# Altium PCB soldering_station_revB.PcbDoc
Units mil, origin at the board's own origin, x right, y up, seen from the top; angles counter-clockwise.
Board outline 3150 x 3390 mil, 2 copper layers (Top Layer, Bottom Layer); 96 components, 51 nets, 269 pads, 76 vias.
Unrouted connection lines stored in the file: 92.
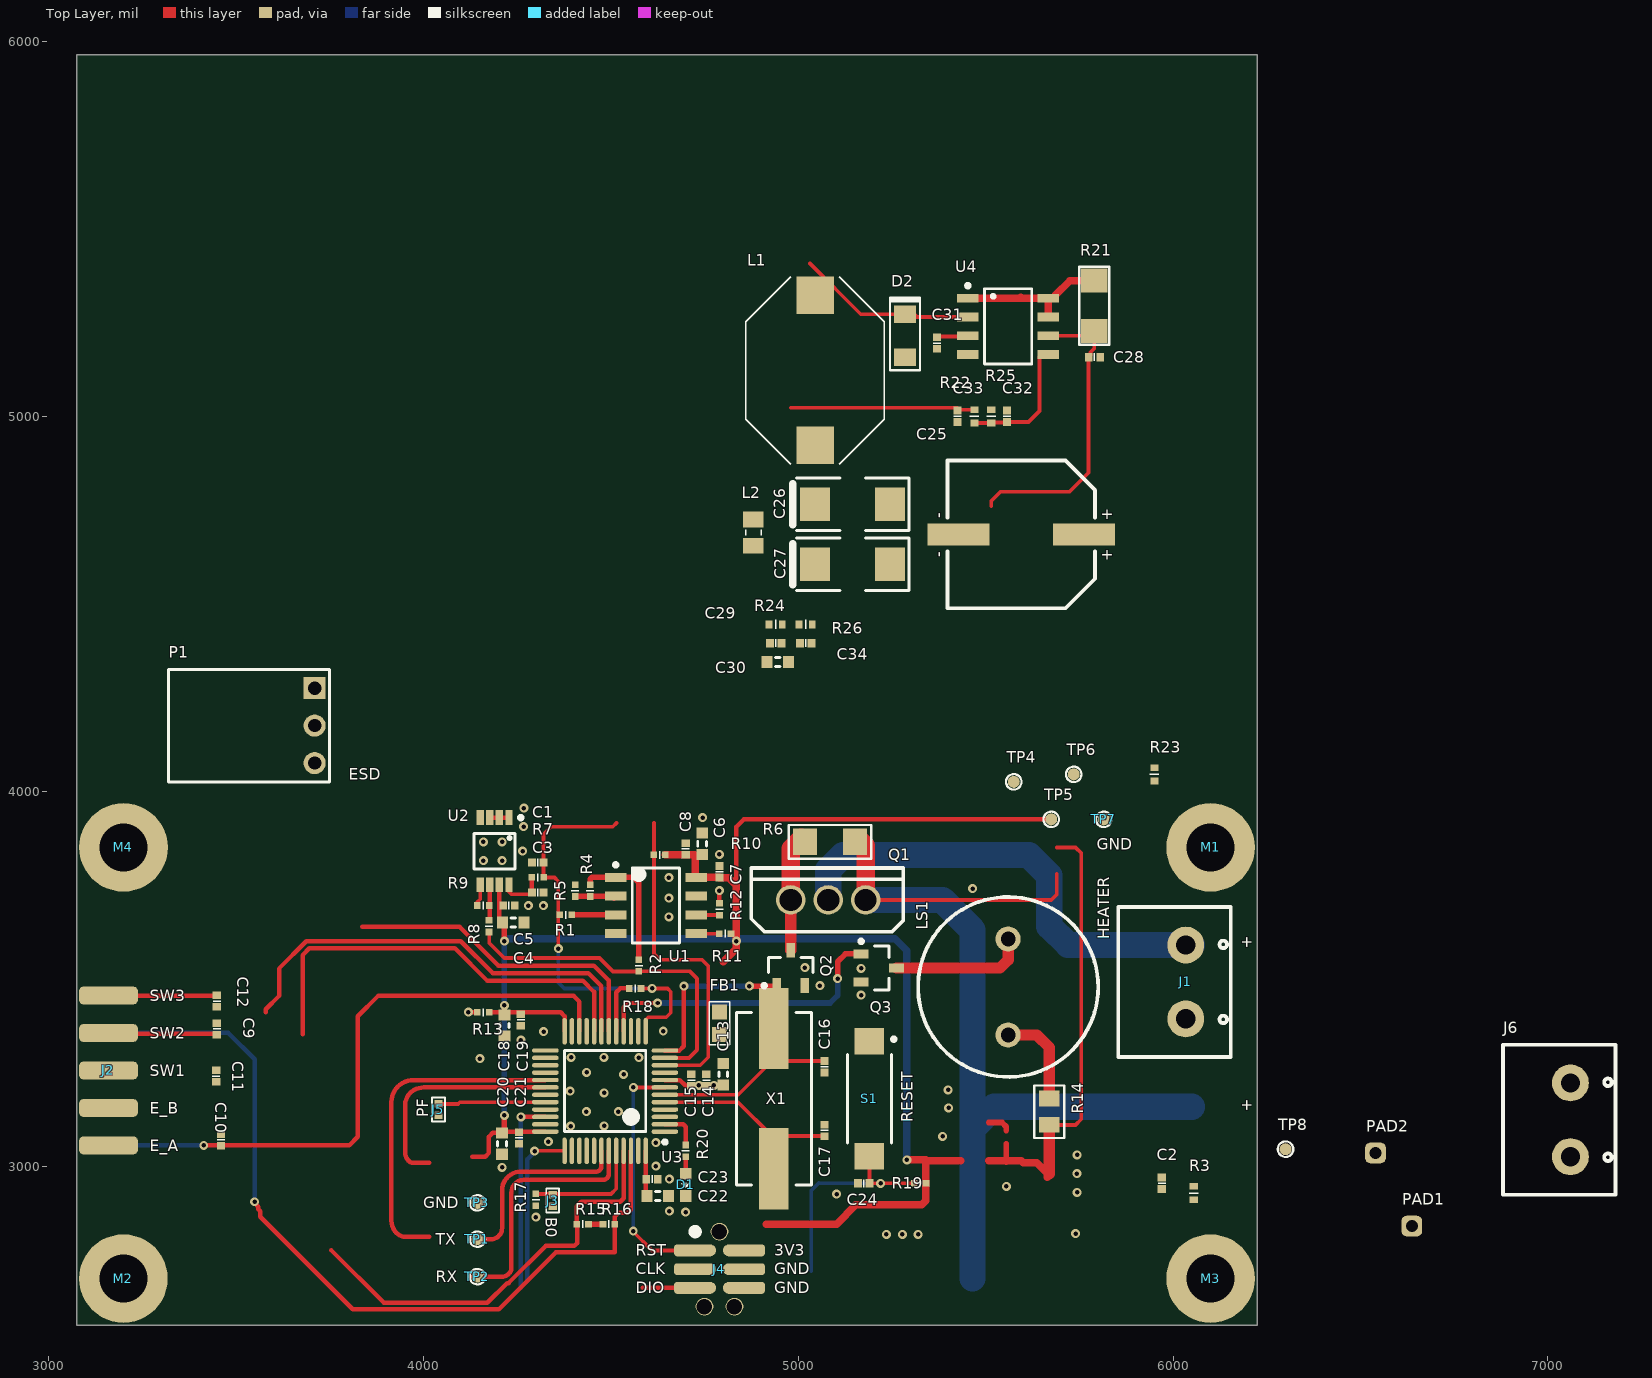
[diagram p0: Top Layer view]
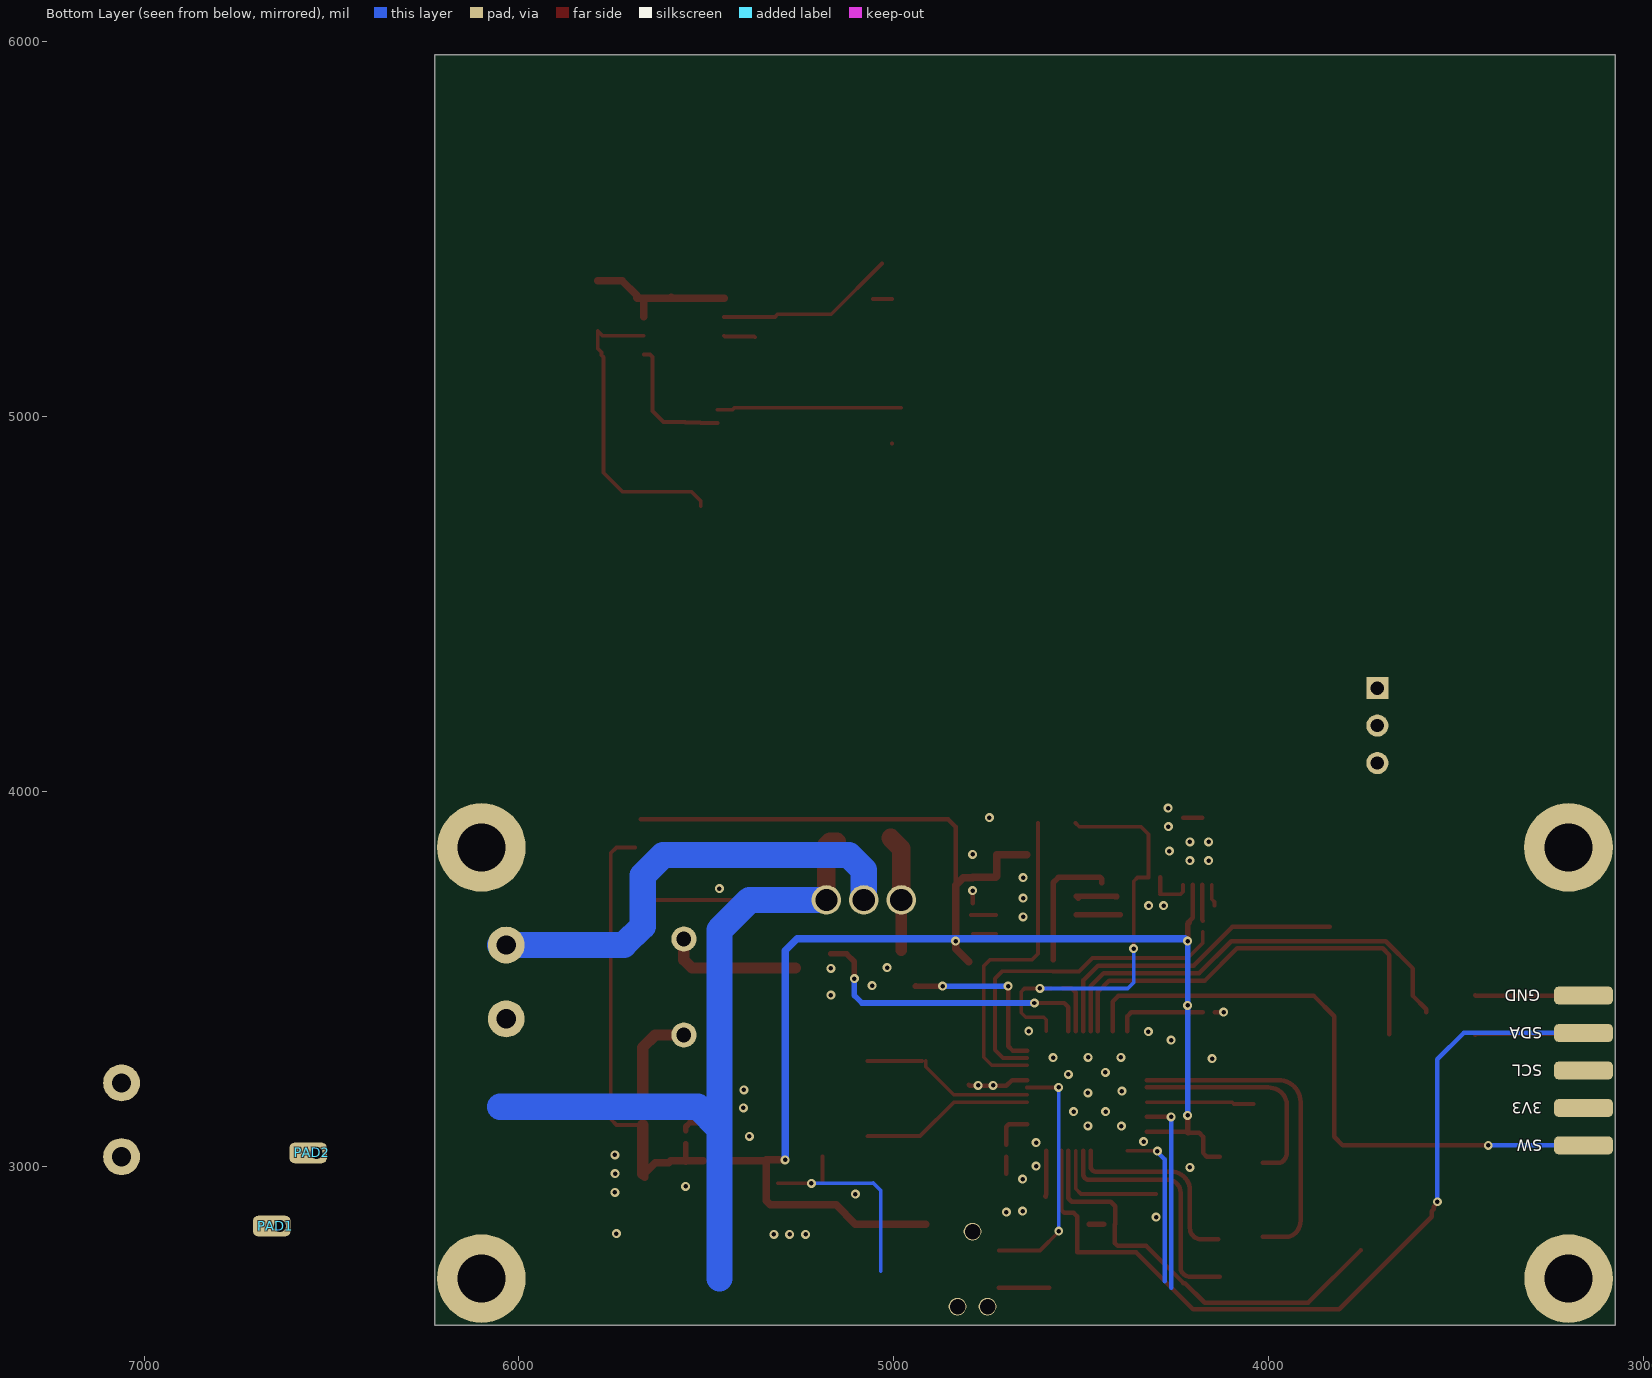
[diagram p1: Bottom Layer view, seen from below]
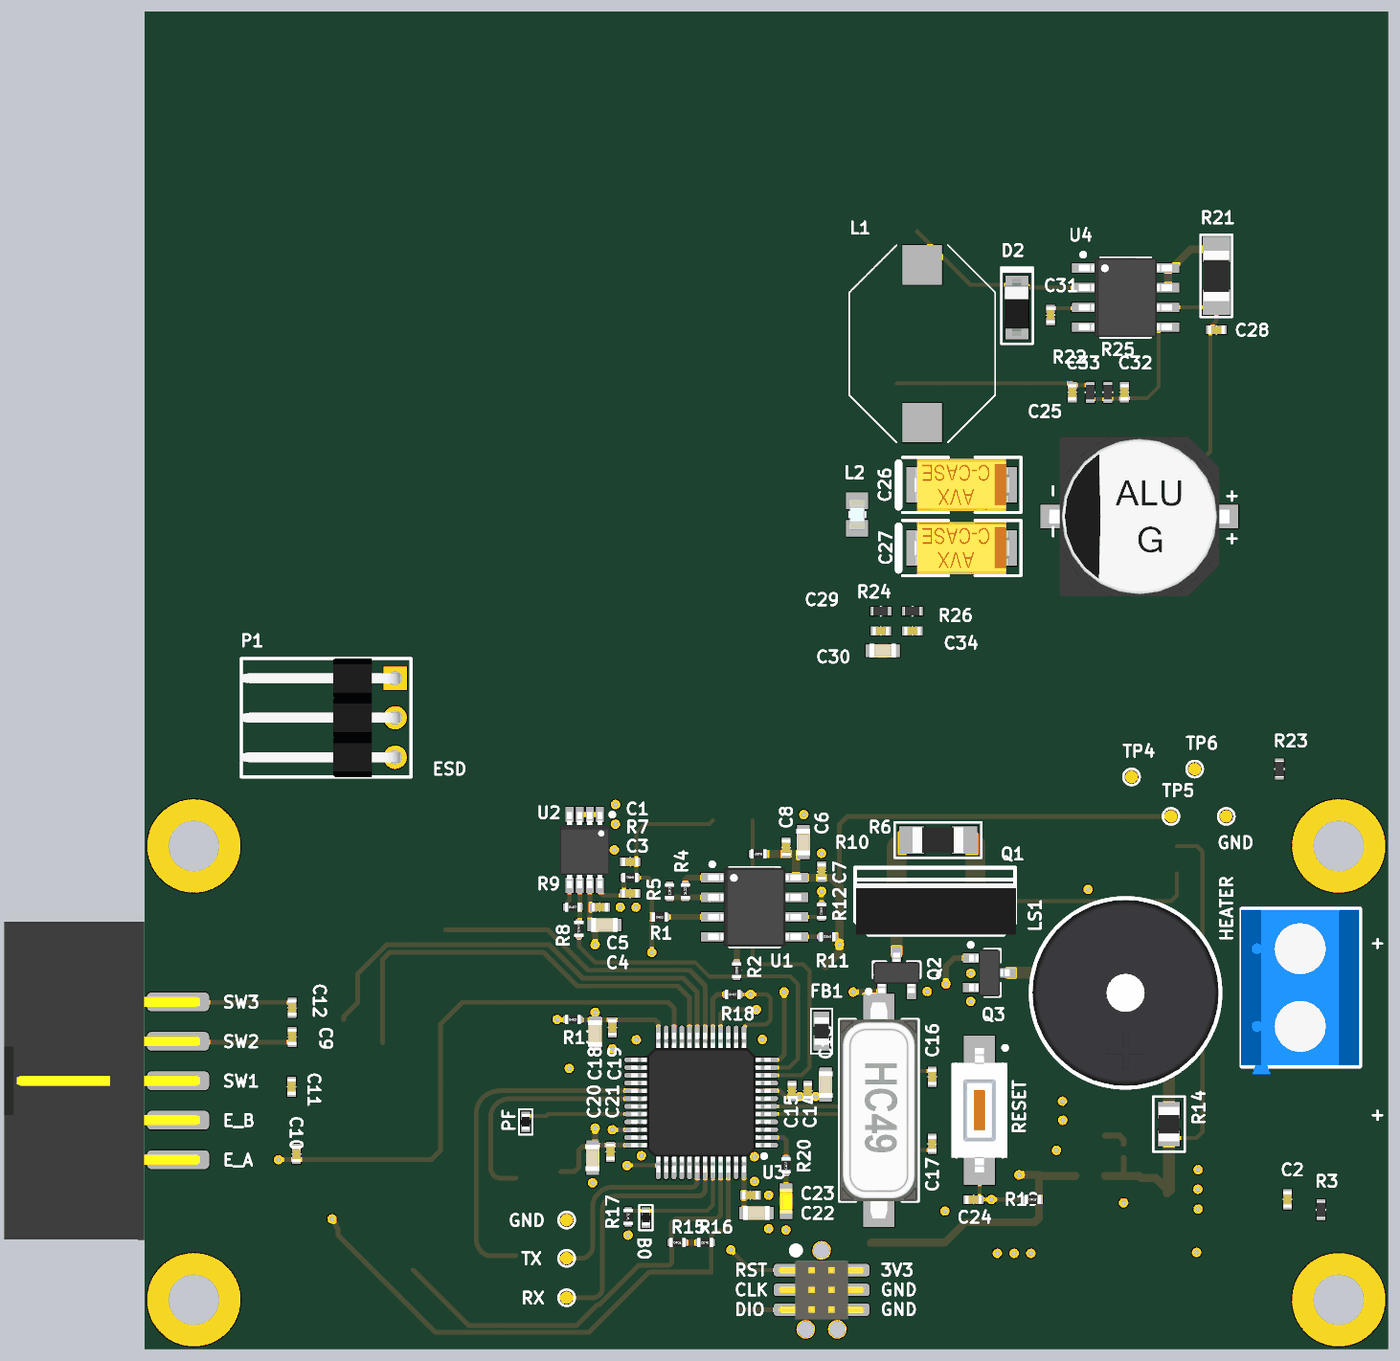
[diagram p2: 3D render of the assembled board from above, using the file's embedded part models]

## Layer stack, top to bottom
Top Solder: solder mask 0.4, Solder Resist, Dk 3.5
Top Layer: signal copper 1.4
Dielectric 1: dielectric 12.6, FR-4, Dk 4.8
Bottom Layer: signal copper 1.4
Bottom Solder: solder mask 0.4, Solder Resist, Dk 3.5

## Board outline
3075,2575 6225,2575 6225,5965 3075,5965

## Design rules (kind name [scope] priority, off if disabled: settings)
BoardOutlineClearance [All] p1: gap=7.87 ignorepadtopadclearanceinfootprint=FALSE
Clearance [All] p1: gap=5 ignorepadtopadclearanceinfootprint=FALSE except(9.84: Arc-Hole Track-Hole SMDPad-Hole THPad-Hole Via-Hole Fill-Hole Poly-Hole Region-Hole Text-Hole)
ComponentClearance [All] p1: gap=5 collisioncheckmode=3 verticalgap=5 showdistances=TRUE
DiffPairsRouting [All] p1: maxlimit=10 minlimit=5 mostfreqgap=5 toplayer_minwidth=5 toplayer_maxwidth=1000 toplayer_prefwidth=5 bottomlayer_minwidth=5 bottomlayer_maxwidth=1000 bottomlayer_prefwidth=5 maxuncoupledlength=500
Height [All] p1: minheight=0 maxheight=71497.94 prefheight=500
HoleSize [All] p1: absolutevalues=TRUE maxlimit=248.03 minlimit=11.81 maxpercent=80.000 minpercent=20.000
HoleToHoleClearance [All] p1: gap=9.84 allowstackedmicrovias=FALSE
MinimumAnnularRing [All] p1: minimumring=3
MinimumSolderMaskSliver [All] p1: minsoldermaskwidth=0
PlaneClearance [All] p1: clearance=5
PlaneConnect PlaneConnectPowerPads [InPadClass('PowerPads')] p1: planeconnectstyle=Direct reliefexpansion=20 reliefentries=4 reliefconductorwidth=10 reliefairgap=10
PlaneConnect [All] p2: pad.planeconnectstyle=Relief pad.reliefexpansion=11.81 pad.reliefentries=4 pad.reliefconductorwidth=5 pad.reliefairgap=5 via.planeconnectstyle=Direct via.reliefexpansion=11.81 via.reliefentries=4 via.reliefconductorwidth=5 via.reliefairgap=5
PolygonConnect PolygonConnectPowerPads [All vs (InPadClass('PowerPads'))] p1: connectstyle=Direct reliefconductorwidth=10 reliefentries=4 polygonreliefangle="90 Angle" airgapwidth=10
PolygonConnect [All] p2: thpad.connectstyle=Relief thpad.reliefconductorwidth=20 thpad.reliefentries=4 thpad.polygonreliefangle="90 Angle" thpad.airgapwidth=5 smdpad.connectstyle=Relief smdpad.reliefconductorwidth=10 smdpad.reliefentries=4 smdpad.polygonreliefangle="90 Angle" smdpad.airgapwidth=5 via.connectstyle=Direct via.reliefconductorwidth=5 via.reliefentries=4 via.polygonreliefangle="90 Angle" via.airgapwidth=5
RoutingVias [All] p1: holewidth=11.81 width=23.62 viastyle="Through Hole" minholewidth=11.81 minwidth=23.62 maxholewidth=23.62 maxwidth=259.84
SilkToSilkClearance [All] p1: silktosilkclearance=0
SilkToSolderMaskClearance SilkToSolderMaskClearance_C0805 [HasFootprint('C_0805_2012')] p1: minsilkscreentomaskgap=3 clearancetoexposedcopper=TRUE
SilkToSolderMaskClearance SilkToSolderMaskClearance_C0603 [HasFootprint('C_0603_1608')] p2: minsilkscreentomaskgap=3 clearancetoexposedcopper=TRUE
SilkToSolderMaskClearance SilkToSolderMaskClearance_R0402 [HasFootprint('R_0402_1005')] p3: minsilkscreentomaskgap=3 clearancetoexposedcopper=TRUE
SilkToSolderMaskClearance SilkToSolderMaskClearance_C0402 [HasFootprint('C_0402_1005')] p4: minsilkscreentomaskgap=3 clearancetoexposedcopper=TRUE
SilkToSolderMaskClearance [IsPad] p5: minsilkscreentomaskgap=5 clearancetoexposedcopper=TRUE
SolderMaskExpansion SolderMaskExpansion_Via [IsVia] p1: expansion=0 istentingtop=FALSE soldermaskfromhole=TRUE
SolderMaskExpansion [All] p2: expansion=2.95 istentingtop=FALSE
Width [All] p1: maxlimit=1000 minlimit=3 preferedwidth=5 minimp=50.000000 maximp=50.000000 favimp=50.000000
20 further rules are at their usual default settings.

## Classes and differential pairs
component class top: J6 M1 M2 M3 M4 PAD1 PAD2 TP7 TP8
component class U_heater: C1 C2 C3 C4 C5 C6 C7 C8 J1 P1 Q1 Q2 R1 R2 R3 R4 R5 R6 R7 R8 R9 R10 R11 R12 U1 U2
component class U_PSU: C25 C26 C27 C28 C29 C30 C31 C32 C33 C34 D2 L1 L2 R21 R22 R23 R24 R25 R26 TP4 TP5 TP6 U4
component class U_MCU: C9 C10 C11 C12 C13 C14 C15 C16 C17 C18 C19 C20 C21 C22 C23 C24 D1 FB1 J2 J3 J4 J5 LS1 Q3 R13 R14 R15 R16 R17 R18 R19 R20 S1 TP1 TP2 TP3 U3 X1

## Components (designator, comment, footprint, x,y, rotation, side; value= is the part's Value field where it differs from the comment)
C1 "Ceramic X7R" C_0402_1005 4305.35,3810 r180 top value=100nF
C2 "Ceramic X7R" C_0402_1005 5970,2954.35 r90 top value=100nF
C3 "Ceramic X7R" C_0402_1005 4305,3730 r0 top value=100nF
C4 "Ceramic X5R" C_0603_1608 4240,3650 r0 top value=10uF
C5 "Ceramic X7R" C_0402_1005 4228.39,3695 r0 top value=100nF
C6 "Ceramic X7R" C_0603_1608 4743.86,3860 r90 top value=1uF
C7 "Ceramic X7R" C_0402_1005 4790,3785 r90 top value=100nF
C8 "Ceramic X7R" C_0402_1005 4700,3845.91 r90 top value=100nF
C9 "Ceramic X7R" C_0402_1005 3449.14,3365.99 r90 top value=100nF
C10 "Ceramic X7R" C_0402_1005 3460,3069.65 r90 top value=100nF
C11 "Ceramic X7R" C_0402_1005 3447.53,3240 r270 top value=100nF
C12 "Ceramic X7R" C_0402_1005 3449.14,3440 r270 top value=100nF
C13 "Ceramic X7R" C_0603_1608 4800,3245.35 r270 top value=1uF
C14 "Ceramic X7R" C_0402_1005 4755,3229.53 r270 top value=100nF
C15 "Ceramic X7R" C_0402_1005 4715,3229.53 r270 top value=10nF
C16 "Ceramic C0G" C_0402_1005 5070,3265 r270 top value=22pF
C17 "Ceramic C0G" C_0402_1005 5070,3095 r90 top value=22pF
C18 "Ceramic X7R" C_0603_1608 4216.26,3375 r270 top value=1uF
C19 "Ceramic X7R" C_0402_1005 4260,3390 r270 top value=100nF
C20 "Ceramic X7R" C_0603_1608 4210,3060 r270 top value=1uF
C21 "Ceramic X7R" C_0402_1005 4255,3075 r270 top value=100nF
C22 "Ceramic X7R" C_0603_1608 4625,2920 r0 top value=1uF
C23 "Ceramic X7R" C_0402_1005 4610,2965 r0 top value=100nF
C24 "Ceramic X7R" C_0402_1005 5175,2954 r180 top value=100nF
C25 "Electrolytic Capacitor" CE_D_10x10MM 5595,4685 r180 top value=100uF
C26 "Tantalum Capacitor" CT_2312_6032 5145,4765.01 r180 top value=470uF
C27 "Tantalum Capacitor" CT_2312_6032 5145,4605 r180 top value=100uF
C28 "Ceramic X7R" C_0402_1005 5790,5157.91 r0 top value=100nF
C29 "Ceramic X7R" C_0402_1005 4940,4395 r0 top value=100nF
C30 "Ceramic X7R" C_0603_1608 4945,4345 r0 top value=1uF
C31 "Ceramic C0G" C_0402_1005 5370,5195.35 r270 top value=470pF
C32 "Ceramic X7R" C_0402_1005 5557.23,5000 r90 top value=100nF
C33 "Ceramic X7R" C_0402_1005 5425,5000 r270 top value=100nF
C34 "Ceramic X7R" C_0402_1005 5020,4395 r0 top value=100nF
D1 "USER" OL_0603_1608 4700,2950 r90 top value=LTST-C190KRKT
D2 "1N5819HW" SOD123 5285,5215 r270 top value=1N5819HW-7-F
FB1 "Ferrite bead" FB_0603_1608 4790,3380.91 r270 top value=BLM18EG221TN1D
J1 "HEATER" J_ARK2 6033.94,3491.18 r270 top value=DG301-5.0-02P-12-18A(H)
J2 "2x5 IDC" "IDC 2x5 EDGE" 3160,3255 r90 top
J3 "B0" "SOLDER BRIDGE 0402" 4345,2908.05 r90 top
J4 "SWD" TagConnectSWD 4765,2775 r270 top
J5 "PF" "SOLDER BRIDGE 0402" 4040.35,3150.79 r90 top
J6 "PSU" J_ARK2 7060,3123.43 r270 top value=DG301-5.0-02P-12-18A(H)
L1 "DL22" DL22 5045,4922.83 r90 top value=220uH
L2 "Inductor" L_0805_2012 4880,4690 r270 top value=1uH
LS1 "LD-BZEN-1205" LD-BZEN-1205 5560,3477.76 r180 top
M1 "M3 Hole" "M3 Hole" 6115,3850 r0 top
M2 "M3 Hole" "M3 Hole" 3215,2700 r0 top
M3 "M3 Hole" "M3 Hole" 6115,2700 r0 top
M4 "M3 Hole" "M3 Hole" 3215.12,3850 r0 top
P1 "MEASURE" P_HEADER_1x3_2.54_ANGLE 3710,4175 r270 top value=22-28-8032
PAD1 "PAD" PAD_08mm 6637,2840 r90 top
PAD2 "PAD" PAD_08mm 6540,3035 r90 top
Q1 "IRF4905" IRF4905 5080,3710 r90 top
Q2 "NX7002AK" NX7002AK.215 4980,3528.58 r90 top
Q3 "NX7002AK" NX7002AK.215 5215,3528.58 r0 top
R1 "Resistor" R_0402_1005#1 4380,3670 r0 top value=1k
R2 "Resistor" R_0402_1005#1 4575.08,3535 r270 top value=0R
R3 "Resistor" R_0402_1005#2 6055,2928.03 r90 top value=1k
R4 "Resistor" R_0402_1005#1 4445,3735 r90 top value=10k
R5 "Resistor" R_0402_1005#1 4405,3735 r270 top value=1k
R6 "Resistor" R_1206_3216 5085,3865 r0 top value=1k
R7 "Resistor" R_0402_1005#1 4305,3770 r180 top value=0R
R8 "Resistor" R_0402_1005#1 4175,3640 r270 top value=0R
R9 "Resistor" R_0402_1005#1 4160,3695 r0 top value=0R
R10 "Resistor" R_0402_1005#1 4630,3830 r180 top value=470R
R11 "Resistor" R_0402_1005#1 4805,3620 r180 top value=1k
R12 "Resistor" R_0402_1005#1 4790,3685 r270 top value=1k
R13 "Resistor" R_0402_1005#1 4160,3410 r0 top value=22k
R14 "Resistor" R_0805_2012 5670,3145 r270 top value=100R
R15 "Resistor" R_0402_1005#1 4425,2845 r0 top value=4.7k
R16 "Resistor" R_0402_1005#1 4494.84,2845 r180 top value=4.7k
R17 "Resistor" R_0402_1005#1 4300,2910 r90 top value=100k
R18 "Resistor" R_0402_1005#1 4565,3473.76 r0 top value=1k
R19 "Resistor" R_0402_1005#1 5325,2954 r0 top value=100k
R20 "Resistor" R_0402_1005#1 4700,3040.55 r90 top value=470R
R21 "Resistor" R_1206_3216 5790,5295 r90 top value=330k
R22 "Resistor" R_0402_1005#2 5470,5000 r90 top value=360k
R23 "Resistor" R_0402_1005#2 5950,4045 r90 top value=470R
R24 "Resistor" R_0402_1005#2 4940,4445 r180 top value=10k
R25 "Resistor" R_0402_1005#2 5515,5000 r270 top value=220k
R26 "Resistor" R_0402_1005#2 5020,4445 r180 top value=10k
S1 "RESET" S_TACTSWITCH3x6 5190,3180 r270 top
TP1 "TX" TP_PAD 4144.25,2805 r90 top
TP2 "RX" TP_PAD 4144.25,2705 r90 top
TP3 "GND" TP_PAD 4144.25,2901.86 r90 top
TP4 "VIN" TP_PAD 5575,4025 r90 top
TP5 "3V3" TP_PAD 5675,3925 r90 top
TP6 "GND" TP_PAD 5735,4045 r90 top
TP7 "GND" TP_PAD 5815,3925 r90 top
TP8 "GND" TP_PAD 6300,3045 r90 top
U1 "OPA2342" OPA2342 4620.35,3695 r0 top
U2 "AD8495" AD8494 4190,3840 r270 top
U3 "STM32F103C8T6" LQFP48_7x7 4485,3200 r180 top
U4 "AZ34063U" AZ34063UMTR-G1 5560,5240 r0 top
X1 "6MHz Crystal" X_HC49_SMD 4935,3180 r270 top value=8MHz

## Footprints (in the part's own frame and the unit in brackets; to place one, negate y for a bottom-side part, rotate by r counter-clockwise, add the part's x,y. Pads: shape width x height; smd on the part's side, far side on the other; paste and mask are expansions set on the pad)
AD8494 [mm] "Precision Thermocouple Amplifiers  with Cold Junction Compensation"
  rect 1x0.5 smd: 1(-2.275,0.975) 2(-2.275,0.325) 3(-2.275,-0.325) 4(-2.275,-0.975) 5(2.275,-0.975) 6(2.275,-0.325) 7(2.275,0.325) 8(2.275,0.975)
  silkscreen extent -2.4,-1.4 1.2,1.9, body extent -2.45,-1.6 2.45,1.6, height 1.1
AZ34063UMTR-G1 [mm] "SOIC-8, IC: PMIC; przetwornica DC/DC; Uwej: 3÷36VDC; Uwyj: 1,25÷36VDC; 1,5A"
  rect 1.45x0.6 smd: 1(-2.725,1.905) 2(-2.725,0.635) 3(-2.725,-0.635) 4(-2.725,-1.905) 5(2.725,-1.905) 6(2.725,-0.635) 7(2.725,0.635) 8(2.725,1.905)
  silkscreen extent -2.85,-2.55 1.6,2.88, body extent -3,-2.55 3,2.55, height 1.35
C_0402_1005 [mm]
  rect 0.52x0.56 smd: 1(-0.39,0) 2(0.39,0)
  silkscreen extent 0,-0.25 0,0.25, body extent -0.52,-0.27 0.53,0.28, height 0.55
C_0603_1608 [mm]
  rect 0.75x0.8 smd: 1(-0.725,0) 2(0.725,0)
  silkscreen extent -0.15,-0.3 0.15,0.3, body extent -0.85,-0.45 0.85,0.45, height 0.89
CE_D_10x10MM [mm]
  rect 4.2x1.5 smd: 1(-4.262,0) 2(4.262,0)
  silkscreen extent -5,-5 5,5, body extent -5.8,-5.15 5.8,5.15, height 10.2
CT_2312_6032 [mm]
  rect 2.03x2.28 smd: 1(2.54,0) 2(-2.54,0)
  silkscreen extent -3.81,-1.78 4.06,1.78, body extent -3.05,-1.67 3.05,1.68, height 2.7
DL22 [mil] "DL22 9.4mm Wire Coil"
  rect 100x100 smd: 1(0,0) 2(400,0)
  silkscreen extent -50,-185 450,185
FB_0603_1608 [mil]
  rect 39x40 smd: 1(-30,0) 2(30,0)
  silkscreen extent -57,-27 57,27, body extent -34,-19 34,19, height 21
"IDC 2x5 EDGE" [mm] "10 pin 2x5 IDC 2.54mm Edge mounted"
  rrect50% 1.2x4 smd: 1(-5.08,0) 2(-2.54,0) 3(0,0) 4(2.54,0) 5(5.08,0)
  rrect50% 1.2x4 smd far side: 6(-5.08,0) 7(-2.54,0) 8(0,0) 9(2.54,0) 10(5.08,0)
  body extent -10.25,-1.42 10.25,11.18, height 3.58
IRF4905 [mm] "PMOS TO220"
  round 2 hole 1.5: 1(0,2.54) 2(0,0) 3(0,-2.54)
  silkscreen extent -2.16,-5.08 2.16,5.21, body extent -2.16,-5.15 1.14,5.15, height 19.6
J_ARK2 [mm]
  round 2.5 hole 1.3: 1(-2.5,0) 2(2.5,0)
  silkscreen extent -5.08,-4.57 5.08,3.05, body extent -5,-4.6 5.6,3, height 10.05
L_0805_2012 [mil]
  rect 42x55 smd: 1(-35,0) 2(35,0)
  silkscreen extent -7,-20 7,21, body extent -39,-21 39,21, height 50
LD-BZEN-1205 [mm] "Przetwornik dźwięku: elektromagnetyczny; THT; 2,4kHz; 40mA; H: 9mm"
  round 1.7 hole 1: 1(0,3.25) 2(0,-3.25)
  silkscreen extent -6.1,-6.1 6.1,6.1, body extent -5.99,-6 5.99,6, height 7.6
LQFP48_7x7 [mm] "LQFP, 48-Leads, Body 7x7mm, Pitch 0.5mm, IPC Medium Density"
  oval 1.8x0.3 smd: 1(-4.05,2.75) 2(-4.05,2.25) 3(-4.05,1.75) 4(-4.05,1.25) 5(-4.05,0.75) 6(-4.05,0.25) 7(-4.05,-0.25) 8(-4.05,-0.75) 9(-4.05,-1.25) 10(-4.05,-1.75) 11(-4.05,-2.25) 12(-4.05,-2.75) 25(4.05,-2.75) 26(4.05,-2.25) 27(4.05,-1.75) 28(4.05,-1.25) 29(4.05,-0.75) 30(4.05,-0.25) 31(4.05,0.25) 32(4.05,0.75) 33(4.05,1.25) 34(4.05,1.75) 35(4.05,2.25) 36(4.05,2.75)
  oval 0.3x1.8 smd: 13(-2.75,-4.05) 14(-2.25,-4.05) 15(-1.75,-4.05) 16(-1.25,-4.05) 17(-0.75,-4.05) 18(-0.25,-4.05) 19(0.25,-4.05) 20(0.75,-4.05) 21(1.25,-4.05) 22(1.75,-4.05) 23(2.25,-4.05) 24(2.75,-4.05) 37(2.75,4.05) 38(2.25,4.05) 39(1.75,4.05) 40(1.25,4.05) 41(0.75,4.05) 42(0.25,4.05) 43(-0.25,4.05) 44(-0.75,4.05) 45(-1.25,4.05) 46(-1.75,4.05) 47(-2.25,4.05) 48(-2.75,4.05)
  silkscreen extent -4.18,-2.75 2.75,3.57, body extent -4.5,-4.5 4.5,4.5, height 1.6
"M3 Hole" [mm] "M3 Bolt Hole; 3.25 mm / 6 mm"
  round 6 hole 3.25: 1(-0.381,0)
NX7002AK.215 [mm] "Tranzystor: N-MOSFET; unipolarny; 60V; 0,12A; 325mW; SOT23"
  rect 1x0.6 smd: 1(-1.2,0.95) 2(-1.2,-0.95) 3(1.2,0)
  silkscreen extent -1.32,-1.5 0.7,1.92, body extent -1.3,-1.5 1.3,1.5, height 1.2
OL_0603_1608 [mm]
  rect 0.8x0.8 smd: 1(-0.75,0) 2(0.75,0)
  silkscreen extent -0.15,-0.25 0.15,0.25, body extent -0.8,-0.4 0.8,0.4, height 0.75
OPA2342 [mm] "Wzmacniacz operacyjny; 1MHz; 2,7E,5V; Kanały: 2; SO8"
  rect 1.45x0.6 smd: 1(-2.725,1.905) 2(-2.725,0.635) 3(-2.725,-0.635) 4(-2.725,-1.905) 5(2.725,-1.905) 6(2.725,-0.635) 7(2.725,0.635) 8(2.725,1.905)
  silkscreen extent -2.85,-2.55 1.6,2.88, body extent -3,-2.55 3,2.55, height 2.5
P_HEADER_1x3_2.54_ANGLE [mm] "Connector; Header; 3 Position, Male"
  rect 1.5x1.5 hole 0.9: 1(-2.54,0)
  round 1.5 hole 0.9: 2(0,0) 3(2.54,0)
  silkscreen extent -3.81,-9.91 3.81,1.02, body extent -3.81,-10 3.81,0.32, height 2.65
PAD_08mm [mm]
  rrect50% 1.4x1.4 hole 0.8: 1(0,0)
  rrect50% 1.4x2.5 smd far side: 1(0,-0.584)
R_0402_1005#1 [mm]
  rect 0.45x0.45 smd: 1(-0.4,0) 2(0.4,0)
  silkscreen extent 0,-0.25 0,0.25, body extent -0.52,-0.3 0.52,0.3, height 0.34
R_0402_1005#2 [mm] "Chip Resistor, 2-Leads, Body 1.00x0.50mm, IPC High Density"
  rect 0.45x0.55 smd: 1(-0.45,0) 2(0.45,0)
  silkscreen extent 0,-0.3 0,0.3, body extent -0.53,-0.28 0.53,0.28, height 0.37
R_0805_2012 [mil]
  rect 42x55 smd: 1(-35,0) 2(35,0)
  silkscreen extent -70,-40 70,40, body extent -43,-27 43,27, height 27
R_1206_3216 [mil]
  rect 64x70 smd: 1(-67,0) 2(67,0)
  silkscreen extent -110,-45 110,45, body extent -64,-32 64,32, height 27
S_TACTSWITCH3x6 [mm] "SODFL, 2-Leads, Body 3,00x8,00mm, IPC Medium Density"
  rect 1.8x2 smd: 1(-3.9,0) 2(3.9,0)
  silkscreen extent -4.15,-1.5 3,1.78, body extent -4,-1.8 4,1.8, height 2.6
SOD123 [mm]
  rect 1.2x1.5 smd: 1(-1.45,0) 2(1.45,0)
  silkscreen extent -2.57,-1.02 2.34,1.02, body extent -1.86,-0.81 1.84,0.79, height 1.27
"SOLDER BRIDGE 0402" [mm] "Solder Bridge 0402 Footprint"
  rect 0.52x0.56 smd: 1(-0.39,0) 2(0.39,0)
  silkscreen extent -0.81,-0.43 0.81,0.43, body extent -0.51,-0.25 0.51,0.25, height 0.36
TagConnectSWD [mm] "6-pin TagConnect and 1.27mm IDC SWD Header"
  round 0.8 smd: 1(0,0) 2(0,1.27) 3(1.27,0) 4(1.27,1.27) 5(2.54,0) 6(2.54,1.27)
  rrect50% 0.8x2.6 smd: 1(0,-1.143) 2(0,2.413) 3(1.27,-1.143) 4(1.27,2.413) 5(2.54,-1.143) 6(2.54,2.413)
  round 1.2 hole 1.05: 7(-1.27,0.635) 7(3.81,-0.381) 7(3.81,1.651)
  silkscreen extent -1.47,-1.22 -1.07,-0.82, body extent -0.64,-2.11 3.18,3.39, height 4.5
TP_PAD [mil] "Small SMD testpoint"
  round 32 smd paste-16: 1(0,0)
  silkscreen extent -21,-21 21,21
X_HC49_SMD [mm] "HC49, 2-Leads"
  rect 5.5x2 smd: 1(-4.75,0) 2(4.75,0)
  silkscreen extent -5.84,-2.54 5.84,2.54, body extent -6.95,-2.5 6.95,2.5, height 4.5

## Part data
C1 C2 C3 C5 C9 C10 C11 C12 C14 C19 C21 C23 C24 C29 C32 C33 C34: library part C_100nF_16V_X7R_0402_10, "Capacitor", Dielectric=X7R, Manufacturer=Murata, Manufacturer Part Number=GRM155R71C104KA88D, Tolerance (%)=10, Voltage=16V, HelpURL=https://www.mouser.com/ds/2/281/c02e-2905.pdf, Part Number=C_100nF_16V_X7R_0402_10, SCH_Footprint=0402, Supplier 1=TME, Supplier 2="RS Components", Supplier 3=Farnell, Supplier 4=Mouser, Supplier 5=Digi-Key, Supplier Part Number 4=81-GRM155R71C104KA88
  C2 C32 C33 C34: Supplier 6=LCSC
C4: library part C_10uF_16V_X5R_0603_20, "Capacitor", Dielectric=X5R, Manufacturer="Samsung Electro-Mechanics", Manufacturer Part Number=CL10A106MO8NQNC, Tolerance (%)=20, Voltage=16V, HelpURL=http://www.tme.eu/pl/Document/4a42202b32dab16128fe107dd69598cc/samsung-chip-cap.pdf, Part Number=C_10uF_16V_X5R_0603_20, SCH_Footprint=0603, Supplier 1=TME, Supplier 2="RS Components", Supplier 3=Farnell, Supplier 4=Mouser, Supplier 5=Digi-Key, Supplier Part Number 1=CL10A106MO8NQNC
C6 C13 C18 C20 C22 C30: library part C_1uF_25V_X7R_0603_10, "Capacitor", Dielectric=X7R, Manufacturer=Samsung, Manufacturer Part Number=CL10B105KA8NNNC, Tolerance (%)=10, Voltage=25V, HelpURL=http://www.tme.eu/pl/Document/4a42202b32dab16128fe107dd69598cc/samsung-chip-cap.pdf, Part Number=C_1uF_25V_X7R_0603_10, SCH_Footprint=0603, Supplier 1=TME, Supplier 2="RS Components", Supplier 3=Farnell, Supplier 4=Mouser, Supplier 5=Digi-Key, Supplier Part Number 1=CL10B105KA8NNNC
C7 C8 C28: library part C_100nF_50V_X7R_0402_10, "Capacitor", Dielectric=X7R, Manufacturer=Murata, Manufacturer Part Number=GRM155R71H104KE14D, Tolerance (%)=10, Voltage=50V, HelpURL=http://docs-europe.electrocomponents.com/webdocs/145f/0900766b8145f9d2.pdf, Part Number=C_100nF_50V_X7R_0402_10, SCH_Footprint=0402, Supplier 1=TME, Supplier 2="RS Components", Supplier 3=Farnell, Supplier 4=Mouser, Supplier 5=Digi-Key, Supplier Part Number 1=GRM155R71H104KE14D, Supplier Part Number 2=8847087, Supplier Part Number 3=2611912, Supplier Part Number 4=81-GRM155R71H104KE4D, Supplier Part Number 5=490-10700-1-ND
  C28: Supplier 6=LCSC
C15: library part C_10nF_25V_X7R_0402_10, "Capacitor", Dielectric=X7R, Manufacturer=Murata, Manufacturer Part Number=GRM155R71E103KA01D, Tolerance (%)=10, Voltage=25V, HelpURL=http://www.tme.eu/en/Document/e3e731e59cc68b1ab6d46b158bb05733/MURATA_GRM.pdf, Part Number=C_10nF_25V_X7R_0402_10, SCH_Footprint=0402, Supplier 1=TME, Supplier 2="RS Components", Supplier 3=Farnell, Supplier 4=Mouser, Supplier 5=Digi-Key, Supplier Part Number 1=GRM155R71E103KA01D, Supplier Part Number 2=6242301, Supplier Part Number 3=8819734, Supplier Part Number 4=81-GRM36X103K25, Supplier Part Number 5=490-1312-1-ND
C16 C17: library part C_22pF_50V_C0G_0402_5, "Capacitor", Dielectric=C0G, Manufacturer=AVX, Manufacturer Part Number=04025A220JAT2A, Tolerance (%)=5, Voltage=50V, HelpURL=http://datasheet.octopart.com/04025A220JAT2A-AVX-datasheet-9883399.pdf, Part Number=C_22pF_50V_C0G_0402_5, SCH_Footprint=0402, Supplier 1=TME, Supplier 2="RS Components", Supplier 3=Farnell, Supplier 4=Mouser, Supplier 5=Digi-Key, Supplier Part Number 1=04025A220JAT2A, Supplier Part Number 2=6983087, Supplier Part Number 3=2280776, Supplier Part Number 4=581-04025A220J, Supplier Part Number 5=478-1074-1-ND
C25: library part CE_100uF_50V_AL2O3_10x10_20, "Polarized Capacitor", Dielectric=AL2O3, Manufacturer=Nichicon, Manufacturer Part Number=UUX1H101MNL1GS, Tolerance (%)=20, Voltage=50V, HelpURL=https://datasheet.octopart.com/UUX1H101MNL1GS-Nichicon-datasheet-62047998.pdf, Part Number=CE_100uF_50V_AL2O3_10x10_20, SCH_Footprint=10x10, Supplier 1=TME, Supplier 2="RS Components", Supplier 3=Farnell, Supplier 4=Mouser, Supplier 5=Digi-Key, Supplier 6=LCSC, Supplier Part Number 1=UUX1H101MNL1GS, Supplier Part Number 2=739-3107, Supplier Part Number 3=2841943, Supplier Part Number 4=647-UUX1H101MNL1GS, Supplier Part Number 5=493-6269-1-ND
C26 C27: library part CT_22uF_16V_TA2O5_2312_10, "Capacitor", Dielectric=TA2O5, Manufacturer=Kemet, Manufacturer Part Number=T494C226K016AT, Tolerance (%)=10, Voltage=10V, HelpURL=https://content.kemet.com/datasheets/KEM_T2008_T494.pdf, Part Number=CT_22uF_16V_TA2O5_2312_10, SCH_Footprint=2312, Supplier 1=TME, Supplier 2="RS Components", Supplier 3=Farnell, Supplier 4=Mouser, Supplier 5=Digi-Key, Supplier 6=LCSC, Supplier Part Number 1=T494C226K016AT, Supplier Part Number 2=1726639, Supplier Part Number 3=2762195, Supplier Part Number 4=80-T494C226K016, Supplier Part Number 5=399-3845-1-ND
C31: library part C_470pF_50V_C0G_0402_5, "Capacitor", Dielectric=C0G, Manufacturer=AVX, Manufacturer Part Number=04025A471JAT2A, Tolerance (%)=5, Voltage=50V, HelpURL=http://datasheet.octopart.com/04025A471JAT2A-AVX-datasheet-9883399.pdf, Part Number=C_470pF_50V_C0G_0402_5, SCH_Footprint=0402, Supplier 1=TME, Supplier 2="RS Components", Supplier 3=Farnell, Supplier 4=Mouser, Supplier 5=Digi-Key, Supplier 6=LCSC, Supplier Part Number 2=6983119P, Supplier Part Number 3=2280781, Supplier Part Number 4=581-04025A471JAT2A, Supplier Part Number 5=478-7880-1-ND
D1: library part OL_R_0603, "LED_RED", Manufacturer=Lite-On, Manufacturer Part Number=LTST-C190KRKT, HelpURL=https://datasheet.octopart.com/LTST-C190KRKT-Lite-On-datasheet-158191.pdf, Part Number=OL_R_0603, SCH_Footprint=0603, Supplier 1=TME, Supplier 2="RS Components", Supplier 3=Farnell, Supplier 4=Mouser, Supplier 5=Digi-Key, Supplier Part Number 1=LTST-C190KRKT, Supplier Part Number 2=1769795, Supplier Part Number 4=859-LTST-C190KRKT, Supplier Part Number 5=160-1436-1-ND
D2: library part D_1N5819HW_1A_40V_SOD123, Current=1A, Manufacturer="Diodes Inc", Manufacturer Part Number=1N5819HW-7-F, Voltage=40V, HelpURL=https://datasheet.octopart.com/1N5819HW-7-F-Diodes-Inc.-datasheet-8332965.pdf, Part Number=D_1N5819HW_1A_40V_SOD123, SCH_Footprint=SOD123, Supplier 1=TME, Supplier 2="RS Components", Supplier 3=Farnell, Supplier 4=Mouser, Supplier 5=Digi-Key, Supplier 6=LCSC, Supplier Part Number 1=1N5819HW-7-F, Supplier Part Number 2=7082197, Supplier Part Number 3=1773475, Supplier Part Number 4=621-1N5819HW-F, Supplier Part Number 5=1N5819HW-FDICT-ND
FB1: library part FB_BLM18EG221TN1D, "Ferrite Bead", Current=1A, Manufacturer=Murata, Manufacturer Part Number=BLM18EG221TN1D, Resistance=150mR, HelpURL=http://datasheet.octopart.com/BLM18EG221TN1D-Murata-datasheet-66919.pdf, Part Number=FB_BLM18EG221TN1D, SCH_Footprint=0603, Supplier 1=TME, Supplier 2="RS Components", Supplier 3=Farnell, Supplier 4=Mouser, Supplier 5=Digi-Key, Supplier 6=LCSC, Supplier Part Number 2=7926243P, Supplier Part Number 3=1515717, Supplier Part Number 4=81-BLM18EG221TN1D, Supplier Part Number 5=490-5979-1-ND
J1 J6: library part J_TB-5.0-P-2P, "ARK Screw terminal, 2-Pin", Manufacturer="DEGSON ELECTRONICS", Manufacturer Part Number=DG301-5.0-02P-12-18A(H), Supplier Part Number 1=DG301-5.0-2/6B, Component Type=Standard, HelpURL=https://datasheet.octopart.com/DG301-5.0-03P-12-18A%28H%29-Degson-datasheet-17801202.pdf, Part Number=J_TB-5.0-P-2P, SCH_Footprint=ARK2, Supplier 1=TME, Supplier 2="RS Components", Supplier 3=Farnell, Supplier 4=Mouser, Supplier 5=Digi-Key
J2: library part IDC_2x5, "2x5 IDC Header"
J3 J5: library part "Solder Bridge", "Solder Bridge Jumper"
J4: library part TagConnectSWD, "TagConnect and 1.27mm IDC SWD Header"
L1: "Dławik: drutowy; SMD; 1uH; Ipracy: 7,1A; 8mΩ; Isat: 7,6A; B: 9,4mm"
L2: library part L_15uH_250mA_0805, "Induction", Current=1100mA, Manufacturer=VIKING, Manufacturer Part Number=NL05KTC1R0, Resistance=169mR, HelpURL=https://www.tme.eu/pl/details/nl05ktc1r0/dlawiki-smd-0805/viking/, Part Number=NL05KTC1R0, SCH_Footprint=0805, Supplier 1=TME, Supplier 2="RS Components", Supplier 3=Farnell, Supplier 4=Mouser, Supplier 5=Digi-Key, Supplier 6=LCSC, Supplier Part Number 3=2215651, Supplier Part Number 4=810-MLZ2012M150WT000, Supplier Part Number 5=445-6397-1-ND, Supplier Part Number 6=C383402
LS1: "Przetwornik dźwięku: elektromagnetyczny; THT; 2,4kHz; 40mA; H: 9mm"
M1 M2 M3 M4: "Inner diamater 3.25 mm Outer diamerer 6 mm"
P1: library part P_HEADER_1x3_2.54_ANGLE, "Pin Header", Manufacturer=Molex, Manufacturer Part Number=22-28-8032, HelpURL=https://datasheet.octopart.com/022288032-Molex-datasheet-8335722.pdf, Part Number=P_HEADER_1x3_2.54_ANGLE, SCH_Footprint="1x3 2.54mm", Supplier 1=TME, Supplier 2="RS Components", Supplier 3=Farnell, Supplier 4=Mouser, Supplier 5=Digi-Key, Supplier 6=LCSC, Supplier Part Number 4=538-22-28-8032, Supplier Part Number 5=WM50015-03-ND
PAD1 PAD2: library part J_PAD, "PCB Pad", Part Number=J_PAD, SCH_Footprint=1.4x2.5mm, Supplier 1=TME, Supplier 2="RS Components", Supplier 3=Farnell, Supplier 4=Mouser, Supplier 5=Digi-Key, Supplier 6=LCSC
Q1: "PMOS TO-220"
Q2 Q3: library part NX7002AK.215, "Tranzystor: N-MOSFET; unipolarny; 60V; 0,12A; 325mW; SOT23"
R1 R3 R5 R11 R12 R18: library part R_1k_0402_1, Manufacturer=Yageo, Manufacturer Part Number=RC0402FR-071K, Power=63mW, Tolerance=1%, Voltage=50V, HelpURL=http://www.tme.eu/pl/Document/1a2bc76e2be68b3b1670068306778ce6/rc0402yageo.pdf, Part Number=R_1k_0402_1, SCH_Footprint=0402, Supplier 1=TME, Supplier 2="RS Components", Supplier 3=Farnell, Supplier 4=Mouser, Supplier 5=Digi-Key, Supplier Part Number 1=RC0402FR-071K, Supplier Part Number 3=9239235, Supplier Part Number 4=603-RC0402FR-071KP, Supplier Part Number 5=311-1.00KLRCT-ND
  R3: Supplier 6=LCSC
R2 R7 R8 R9: library part R_0R_0402_5, Manufacturer=Rohm, Manufacturer Part Number=PMR01ZZPJ000, Power=100mW, Tolerance=5%, Voltage=50V, HelpURL=https://pl.mouser.com/datasheet/2/348/pmr-jpw-e-1139188.pdf, Part Number=R_0R_0402_5, SCH_Footprint=0402, Supplier 1=TME, Supplier 2="RS Components", Supplier 3=Farnell, Supplier 4=Mouser, Supplier 5=Digi-Key, Supplier Part Number 4=755-PMR01ZZPJ000, Supplier Part Number 5=RHM1692-6-ND
R4 R24 R26: library part R_10k_0402_1, Manufacturer=Yageo, Manufacturer Part Number=RC0402FR-0710KL, Power=63mW, Supplier Part Number 1=RC0402FR-0710K, Tolerance=1%, Voltage=50V, HelpURL=http://www.tme.eu/pl/Document/1a2bc76e2be68b3b1670068306778ce6/rc0402yageo.pdf, Part Number=R_10k_0402_1, SCH_Footprint=0402, Supplier 1=TME, Supplier 2="RS Components", Supplier 3=Farnell, Supplier 4=Mouser, Supplier 5=Digi-Key
  R24 R26: Supplier 6=LCSC
R6: library part R_47k_1206_1, Manufacturer=Royalohm, Manufacturer Part Number=HP06W2F4702T5E, Power=500mW, Supplier Part Number 1=HP06-47K1%, Tolerance=1%, Voltage=200V, HelpURL=https://www.tme.eu/pl/Document/fa390a0a31e891a154d3713216995c6e/HighPowerHP.pdf, Part Number=R_47k_1206_1, SCH_Footprint=1206, Supplier 1=TME, Supplier 2="RS Components", Supplier 3=Farnell, Supplier 4=Mouser, Supplier 5=Digi-Key
R10 R20 R23: library part R_470R_0402_1, Manufacturer=Yageo, Manufacturer Part Number=RC0402FR-07470RL, Power=63mW, Supplier Part Number 1=RC0402FR-07470R, Tolerance=1%, Voltage=50V, HelpURL=http://datasheet.octopart.com/RC0402FR-07470RL-Yageo-datasheet-10408619.pdf, Part Number=R_470R_0402_1, SCH_Footprint=0402, Supplier 1=TME, Supplier 2="RS Components", Supplier 3=Farnell, Supplier 4=Mouser, Supplier 5=Digi-Key, Supplier Part Number 3=9239197, Supplier Part Number 4=603-RC0402FR-07470RL, Supplier Part Number 5=311-470LRCT-ND
R13: library part R_22k_0402_1, Manufacturer=Panasonic, Manufacturer Part Number=ERA-2AEB223X, Power=63mW, Tolerance=1%, Voltage=50V, HelpURL=http://www.mouser.com/ds/2/315/AOA0000C237-1100991.pdf, Part Number=R_22k_0402_1, SCH_Footprint=0402, Supplier 1=TME, Supplier 2="RS Components", Supplier 3=Farnell, Supplier 4=Mouser, Supplier 5=Digi-Key, Supplier Part Number 2=566557, Supplier Part Number 3=1577719, Supplier Part Number 4=667-ERA-2AEB223X, Supplier Part Number 5=P22KDCCT-ND
R14: library part R_100R_0805_1, Manufacturer=Yageo, Manufacturer Part Number=RC0805FR-07100RL, Power=125mW, Supplier Part Number 1=RC0805FR-07100R, Tolerance=1%, Voltage=150V, HelpURL=https://www.tme.eu/pl/Document/7b8fed8c112f8a94930279c22c957f7f/rc0805yageo.pdf, Part Number=R_100R_0805_1, SCH_Footprint=0805, Supplier 1=TME, Supplier 2="RS Components", Supplier 3=Farnell, Supplier 4=Mouser, Supplier 5=Digi-Key, Supplier Part Number 2=618-5135, Supplier Part Number 3=9237364, Supplier Part Number 4=603-RC0805FR-07100RL, Supplier Part Number 5=311-100CRCT-ND
R15 R16 R17 R19: library part R_100k_0402_1, Manufacturer=Yageo, Manufacturer Part Number=RC0402FR-07100KL, Power=63mW, Supplier Part Number 1=RC0402FR-07100K, Tolerance=1%, Voltage=50V, HelpURL=http://www.tme.eu/pl/Document/1a2bc76e2be68b3b1670068306778ce6/rc0402yageo.pdf, Part Number=R_100k_0402_1, SCH_Footprint=0402, Supplier 1=TME, Supplier 2="RS Components", Supplier 3=Farnell, Supplier 4=Mouser, Supplier 5=Digi-Key, Supplier Part Number 3=2131798, Supplier Part Number 4=603-RC0402FR-07100KL, Supplier Part Number 5=311-100KLRCT-ND
R21: library part R_330k_1206_1, Manufacturer=Yageo, Manufacturer Part Number=RC1206FR-07330KL, Power=250mW, Tolerance=1%, Voltage=200V, HelpURL=https://datasheet.octopart.com/RC1206FR-07330KL-Yageo-datasheet-8359522.pdf, Part Number=R_330k_1206_1, SCH_Footprint=1206, Supplier 1=TME, Supplier 2="RS Components", Supplier 3=Farnell, Supplier 4=Mouser, Supplier 5=Digi-Key, Supplier 6=LCSC, Supplier Part Number 1=RC1206FR-07330KL, Supplier Part Number 2=1995833, Supplier Part Number 3=9241094, Supplier Part Number 4=603-RC1206FR-07330KL, Supplier Part Number 5=311-330KFRCT-ND
R22: library part R_360R_0402_1, Manufacturer=Yageo, Manufacturer Part Number=RC0402FR-07360RL, Power=63mW, Tolerance=1%, Voltage=50V, HelpURL=https://datasheet.octopart.com/RC0402FR-07360RL-Yageo-datasheet-62067350.pdf, Part Number=R_360R_0402_1, SCH_Footprint=0402, Supplier 1=TME, Supplier 2="RS Components", Supplier 3=Farnell, Supplier 4=Mouser, Supplier 5=Digi-Key, Supplier 6=LCSC, Supplier Part Number 3=2693605, Supplier Part Number 4=603-RC0402FR-07360RL, Supplier Part Number 5=YAG3132CT-ND
R25: library part R_220k_0402_1, Manufacturer=Vishay, Manufacturer Part Number=CRCW0402220KFKED, Power=63mW, Tolerance=1%, Voltage=50V, HelpURL=https://www.farnell.com/datasheets/2310790.pdf, Part Number=R_220k_0402_1, SCH_Footprint=0402, Supplier 1=TME, Supplier 2="RS Components", Supplier 3=Farnell, Supplier 4=Mouser, Supplier 5=Digi-Key, Supplier 6=LCSC, Supplier Part Number 2=678-8967, Supplier Part Number 3=2140958, Supplier Part Number 4=71-CRCW0402-220K-E3, Supplier Part Number 5=541-220KLCT-ND
S1: library part S_TACTSWITCH, "Tact Switch", Manufacturer=Ninigi, Manufacturer Part Number=TACTM-34N-F, HelpURL=http://pl.ninigi.com/product/tactm-34n-f/pdf, Part Number=S_TACTSWITCH, SCH_Footprint=3x6mm, Supplier 1=TME, Supplier 2="RS Components", Supplier 3=Farnell, Supplier 4=Mouser, Supplier 5=Digi-Key, Supplier Part Number 1=TACTM-34N-F
TP1 TP2 TP3 TP4 TP5 TP6 TP7 TP8: library part TP_PAD, "Testpoint", Part Number=TP_PAD, SCH_Footprint=SMD, Supplier 1=TME, Supplier 2="RS Components", Supplier 3=Farnell, Supplier 4=Mouser, Supplier 5=Digi-Key
  TP1 TP2 TP3 TP6 TP7 TP8: Supplier 6=LCSC
  TP4 TP5: Component Type="Standard (No BOM)"
U1: "Wzmacniacz operacyjny; 1MHz; 2,7÷5,5V; Kanały: 2; SO8"
U2: "Precision Thermocouple Amplifiers / with Cold Junction Compensation"
U3: library part UP_STM32F103C8T6, Manufacturer=STMicroelectronics, HelpURL=https://datasheet.octopart.com/STM32F103C8T6-STMicroelectronics-datasheet-48026265.pdf, Manufacturer Part Number=STM32F103C8T6, Part Number=UP_STM32F103C8T6, SCH_Footprint=LQFP48, Supplier 1=TME, Supplier 2="RS Components", Supplier 3=Farnell, Supplier 4=Mouser, Supplier 5=Digi-Key, Supplier Part Number 1=STM32F103C8T6, Supplier Part Number 2=1023545, Supplier Part Number 3=1447637, Supplier Part Number 4=511-STM32F103C8T6, Supplier Part Number 5=497-6063-ND
U4: library part AZ34063UMTR-G1, "IC: PMIC; przetwornica DC/DC; Uwej: 3÷36VDC; Uwyj: 1,25÷36VDC; 1,5A"
X1: library part X_6MHz_HCM49, "Resonator Ceramic", Manufacturer=Ilsi, Manufacturer Part Number="LF XTAL016788", Supplier Part Number 1=6.00M-SMDHC49R, HelpURL=https://www.tme.eu/pl/Document/174d7f33688e5f09d7b9d1d6c85450eb/LFXTAL026900Reel.pdf, Part Number=X_6MHz_HCM49, SCH_Footprint=HCM49, Supplier 1=TME, Supplier 2="RS Components", Supplier 3=Farnell, Supplier 4=Mouser, Supplier 5=Digi-Key, Supplier 6=LCSC, Supplier Part Number 2=1463931, Supplier Part Number 3=9713310, Supplier Part Number 4=449-LFXTAL016788CUTT, Supplier Part Number 5=1923-1490-1-ND

## Via types
v1: diameter 24, hole 12, Top Layer to Bottom Layer, 73 vias
v2: diameter 23.62, hole 11.81, Top Layer to Bottom Layer, 3 vias

## Nets (pads, with @x,y where several pads share a name; then routed paths per layer and width w, separated by ;. In a path a pad name is that pad's centre, name@x,y a point inside that pad or via, vN(x,y) a via of type N, cw(c..) or ccw(c..) an arc to the next point about the centre after c; other vN are vias at no path point)
3.3V: C4.1 C5.1 C6.1 C7.1 C8.1 C18.1 C19.1 C20.1 C21.1 C22.1 C23.1 C27.1 C29.1 C30.1 FB1.1 J2.7 J3.1 J4.2 L2.2 R10.1 R11.1 R13.2 R15.2 R16.2 R19.2 R23.2 R24.2 TP5.1 U1.8 U2.7 U3.24 U3.36 U3.48 | length 5181.7
  Top Layer w12: 4130,3025 4165,3025 4175,3035 4175,3078.54 4185,3088.54 C20.1 C20.1@4215,3088.54 ; R13.2 C18.1@4211.46,3410 ; U2.7 4202.8,3662.4 C4.1@4215.2,3650 ; C20.1@4216.26,3089.8 4218.19,3091.73 U3.36 ; C18.1@4216.26,3410 4366.73,3410 4376.73,3400 U3.24 ; U3.48 4593.27,2923.19 C22.1 C22.1@4594.65,2918.19 ; 4835.31,3749.33 4835.31,3905 4855.31,3925 TP5.1
  Top Layer w15: C4.1 4216.26,3645.2 v1(4216.26,3600) ; C20.1@4215,3088.54 4216.26,3089.8 v1(4216.26,3135) ; C18.1 4216.26,3410 v1(4216.26,3428.43) ; R15.2 R16.2
  Top Layer w20: R10.1 4725,3830 4725,3772.64 U1.8 4789.65,3770 C7.1 4815,3769.65 4835.31,3749.33 v1(4835.31,3600.32) 4835.31,3580.32 4800,3545 ; 4915,2844.25 4915.75,2845 5102.38,2845 5153.72,2896.34 5329.03,2896.34 5340.75,2908.05 R19.2 5340.75,3015.71 ; v1(5290,3016.46) 5340,3016.46 5340.75,3015.71 ; 5433.35,3013.82 5342.64,3013.82 5340.75,3015.71
  Bottom Layer w15: v1(4216.26,3600) v1(4216.26,3428.43) v1(4216.26,3135) v1@4219.69,3138.43
  Bottom Layer w20: v1(4216.26,3600) 4223.26,3607 5258,3607 5290,3575 v1(5290,3016.46)
3V3_Unfiltered: C26.1 C33.1 L1.1 L2.1 R22.2 | length 492.3
  Top Layer w10: 4980.63,5022.72 5410,5022.72 5425,5022.72 5430,5017.72 R22.2 ; L1.1@5005,4927.2 L1.1@5005.63,4927.83
5V: R14.2 | length 1232.6
  Top Layer w10: R14.2@5670,3109.88 5739.88,3109.88 5755,3125 5755,3835 5740,3850 5690,3850
  Top Layer w15: 5555,3010.35 5555,3013.82 5555,3059.25
  Top Layer w20: 5508.15,3013.82 5555,3013.82 5594.72,3013.82 5600,3008.54 5636.46,3008.54 5665,2980 5665,2970
  Top Layer w30: 5670,2979.53 R14.2@5670,3109.88
BOOT0: J3.2 R17.2 U3.44 | length 321.3
  Top Layer w10: R17.2 4500.75,2925.75 4514.53,2939.53 U3.44
BUCK_MON: C34.1 R24.1 R26.2
BUZZER: Q3.1 U3.16 | length 809.8
  Top Layer w12: U3.16 4534.21,3424.21 4545,3435 v1(4625,3435)
  Top Layer w15: v1(5105,3500) 5105,3545 5125.98,3565.98 Q3.1
  Bottom Layer w15: v1(4625,3435) 5085,3435 5105,3455 v1(5105,3500)
ENC_A: J2.1 U3.29 | length 886.3
  Top Layer w12: 4015.28,2811.57 3951.55,2811.57 cw(c3951.55,2843.27) 3929.14,2820.86 cw(c3963.28,2855) 3915,2855 3915,3171.64 cw(c3971.39,3171.64) 3931.52,3211.52 cw(c3975,3168.03) 3975,3229.53 U3.29
ENC_B: J2.2 U3.30 | length 607.5
  Top Layer w12: 4015.28,3008.43 3975,3008.43 cw(c3975,3029.07) 3960.4,3014.47 cw(c3981.76,3035.83) 3951.55,3035.83 3951.55,3162.54 cw(c3997.46,3162.54) 3965,3195 cw(c4000.83,3159.17) 4000.83,3209.84 U3.30
FB: C32.1 R22.1 R25.2 U4.5 | length 357.5
  Top Layer w10: R22.1 R25.2 5516.18,4983.46 5556.05,4983.46 C32.1 5614.53,4984.65 5643.74,5013.86 5643.74,5158.19 5650.55,5165 U4.5
GND: C1.2 C2.2 C3.2 C4.2 C5.2 C6.2 C7.2 C8.2 C9.2 C10.2 C11.2 C12.2 C13.2 C14.2 C15.2 C16.2 C17.2 C18.2 C19.2 C20.2 C21.2 C22.2 C23.2 C24.2 C25.2 C26.2 C27.2 C28.2 C29.2 C30.2 C31.2 C32.2 C33.2 C34.2 D1.1 D2.2 J1.2 J2.10 J4.4 J4.6 J4.7 J5.1 J6.2 M1.1 M2.1 M3.1 M4.1 P1.3 PAD2.1 Q2.2 Q3.2 R5.1 R12.1 R17.1 R25.1 R26.1 S1.1 TP3.1 TP6.1 TP7.1 TP8.1 U1.4 U2.1 U2.2 U2.3 U3.8 U3.23 U3.35 U3.47 U4.4 | length 248.4
  Top Layer w12: U2.3 U2.2 U2.1 ; U3.8 4684.35,3229.53 4699.7,3214.17 C15.2 C14.2 4797.36,3214.17 C13.2 ; R12.1 v1(4790,3735)
  other v1: 5235,2817.5 5277.74,2817.5 5320,2817.5 5739.88,2820 4300,2863.78 4700,2876.81 4656.04,2880 5102.38,2925 5743.78,2930 5555,2945.75 4656.04,2965 5743.31,2980 4210,2996.22 4620.36,3000 5743.78,3030 4620,3062.59 4333.64,3065 5385,3078.89 4392.95,3106.85 4481.96,3107.16 4435,3145 4520,3145 5401.02,3155 4481.96,3195 4391.87,3200 5400,3203.21 4735,3215 4775,3215 4534.21,3244.88 4435.79,3250 4150.73,3286.45 4575,3289.01 4393.92,3290 4481.6,3290 4260,3336.04 4320.75,3358.96 4640,3360 5167.76,3456.18 5057.62,3481.34 5167.76,3527.21 5018,3529.24 4655,3665 4280,3695 4320,3695 4655,3715 5465,3740 4655,3769.65 4160,3815 4210,3815 4790,3831.46 4265,3840 4160,3865 4210,3865 4267.8,3905.26 4745,3929.57 4268.15,3955
HAND_REC: R18.1 U3.17 | length 142.9
  Top Layer w12: U3.17 4514.53,3463.29 4525,3473.76 R18.1
HEATER: J1.1 Q1.2 | length 1245.1
  Bottom Layer w70: Q1.2 5080,3790 5120,3830 5615,3830 5670,3775 5670,3640 5720,3590 J1.1@6050,3590
LED: R20.2 U3.2 | length 106.9
  Top Layer w12: U3.2 4693.58,3111.42 4700,3105 R20.2
NetC2_1: C2.1 R3.2 U3.11
NetC3_1: C3.1 R7.2 U2.8 | length 123
  Top Layer w10: U2.8 4228.39,3731.61 4235,3725 C3.1@4289.65,3725
  Top Layer w12: R7.2 4289.25,3730.39 C3.1
NetC13_1: C13.1 C14.1 C15.1 FB1.2 U3.9
NetC16_1: C16.1 U3.6 X1.1 | length 461.7
  Top Layer w10: U3.6 4840.16,3190.16 4915,3265 X1.1@4915,3280 ; X1.1@4925,3280 4935,3280 5069.65,3280 C16.1
NetC17_1: C17.1 U3.5 X1.2 | length 463.2
  Top Layer w10: U3.5 4839.53,3170.47 4930,3080 4935,3080 5069.65,3080 C17.1
NetC31_1: C31.1 U4.3 | length 84.5
  Top Layer w10: C31.1 5372.15,5212.85 5450.57,5212.85 U4.3
NetD1_2: D1.2 R20.1 | length 45.3
  Top Layer w12: D1.2 R20.1
NetD2_1: D2.1 L1.2 U4.2 | length 531.9
  Top Layer w10: L1.2@5005,5313.02 L1.2@5056.18,5313.02 ; 5031.18,5407.91 5167.01,5272.09 5310,5272.09 5317.09,5265 U4.2
NetD3_2: R23.1
NetLS1_1: LS1.1 R14.1 | length 265.2
  Top Layer w30: LS1.1 5636.46,3349.8 5670,3316.26 R14.1@5670,3175
NetLS1_2: LS1.2 Q3.3 | length 362.3
  Top Layer w30: Q3.3 5538.58,3528.58 5560,3550 LS1.2
NetQ1_1: Q1.1 Q2.3 R6.1 | length 327.7
  Top Layer w30: Q2.3 4980,3691.5 4970.75,3700.75 4970.75,3710 Q1.1@4980,3719.25
  Top Layer w50: Q1.1 4980,3719.25 4980,3847 R6.1@5008,3875
NetR1_2: R1.2 U1.3 | length 117.3
  Top Layer w15: R1.2 U1.3
NetR2_1: R2.1 R4.2 U1.1 | length 352.3
  Top Layer w15: R4.2@4445,3755.75 4445,3765 4450,3770 U1.1 4560.75,3770 4575.08,3755.67 R2.1
NetR2_2: R2.2 R3.1 R8.2 | length 908.4
  Top Layer w10: R8.2@4175.75,3625 4175.75,3595.08 4215.83,3555 4470,3555 4505.75,3519.25 R2.2 ; R2.2@4575,3520 4710,3520 4730,3500 4730,3310 4708.58,3288.58 4644.45,3288.58
NetR4_1: R4.1 R5.2 U1.2 | length 117.4
  Top Layer w15: R5.2 4410,3719.25 4409.25,3720 U1.2 U1.2@4507.76,3714.68
NetR8_1: R8.1 R9.2 U2.6 | length 96
  Top Layer w12: R8.1@4175.75,3655 4177.2,3656.46 U2.6
NetR9_1: R9.1 U2.5 | length 58.5
  Top Layer w10: R9.1 4144.25,3704.25 4151.61,3711.61 U2.5
NetR11_2: R11.2 U1.5 | length 61.6
  Top Layer w10: U1.5 R11.2
NetR12_2: R12.2 U1.6 | length 66.6
  Top Layer w10: U1.6 R12.2@4794.25,3670
NetR21_2: R21.2 U4.1 U4.7 U4.8 | length 413.1
  Top Layer w20: U4.1 5595,5315 ; 5593,5317 5595,5315 ; U4.7 U4.8 ; R21.2 5725,5362 5685.83,5322.83 5685.83,5316.81 5684.02,5315 U4.8 ; 5595,5315 U4.8
NRST: C24.1 J4.1 R19.1 S1.2 U3.7 | length 1245.2
  Top Layer w10: v2(4560,2826.57) 4560,2825 4610,2775 J4.1@4720,2775 ; v1(4560,3209.84) U3.7 ; S1.2 5190,2954.35 C24.1 v1(5220,2954) R19.1
  Bottom Layer w10: v2(4560,2826.57) v1@4560,3204.84 ; 5035,2720 5035,2935 5055,2955 5056,2954 v1(5220,2954)
PROFILE: J5.2 U3.32 | length 287.1
  Top Layer w10: J5.2@4040.35,3165.79 4057.57,3165.79 4092.36,3165.79 4097.05,3170.47 U3.32
PWM_OUT: Q2.1 U3.12 | length 464.2
  Top Layer w12: U3.12 4683.27,3308.27 4695,3320 v1(4695,3480)
  Top Layer w15: v1(4870,3479.84) 4939.76,3479.84 4941.26,3481.34 Q2.1@4942.6,3480
  Bottom Layer w15: v1(4695,3480) 4869.84,3480 v1(4870,3479.84)
REED: C1.1 P1.1 R1.1 R7.1 R18.2 U3.13 | length 1136.2
  Top Layer w10: v1(4360,3580) 4360,3760 4350,3770 R7.1 4320.75,3885.16 4340.85,3905.26 4505.26,3905.26 4515,3915 ; R18.2 4651.24,3473.76 4660,3465 4660,3408.96 4648.26,3397.22 4600,3397.22 4593.27,3390.49 U3.13
  Bottom Layer w10: v1(4360,3580) 4360,3490 4376.1,3473.9 v1(4610,3473.9)
SCL: J2.8 R15.1 U3.45 | length 1138.3
  Top Layer w12: 3755,2775 3895,2635 4170.72,2635 4223.72,2688 4227.28,2688 4326.28,2787 4402.97,2787 4410,2794.03 4410,2844.25 R15.1 4409.25,2893.15 4421.1,2905 4525,2905 4534.21,2914.21 U3.45
SDA: J2.9 R16.1 U3.46 | length 2258.9
  Top Layer w12: v2(3550,2905) 3550,2901.86 3560,2891.86 3560,2885 3565,2880 3565,2865 3812,2618 4201.71,2618 4353.71,2770 4510,2770 4510.59,2770.59 R16.1 4510.59,2865.59 4520,2875 4545,2875 4553.9,2883.9 U3.46
  Bottom Layer w12: J2.9 3480,3355 3550,3285 v2(3550,2905)
SW1: C11.1 J2.3 U3.18 | length 852.2
  Top Layer w12: 3837.48,3637.95 4097.05,3637.95 4200,3535 4455,3535 4494.84,3495.16 U3.18
SW2: C9.1 J2.4 U3.19 | length 1483
  Top Layer w12: J2.4 3162.18,3352.82 3446.96,3352.82 C9.1 ; 3580,3410 3580,3418.74 3615,3453.74 3615,3527.03 3687.97,3600 4100,3600 4185,3515 4440,3515 4475.16,3479.84 U3.19
SW3: C12.1 J2.5 R13.1 U3.20 | length 1519.5
  Top Layer w12: J2.5@3215.12,3455 J2.5 3161.26,3453.74 3447.53,3453.74 C12.1 ; 3677.95,3351.42 3677.95,3562.95 3695.75,3580.75 4084.25,3580.75 4170,3495 4425,3495 4455.47,3464.53 U3.20 ; v1(4120,3410.35) 4120.35,3410 R13.1
SW4: U3.21
SW_ENC: C10.1 J2.6 U3.22 | length 1695.3
  Top Layer w12: v2(3414.14,3055) 3460,3055 3802,3055 3825,3078 3825,3399.65 3879.09,3453.74 4401.26,3453.74 4416.1,3438.9 U3.22
  Bottom Layer w12: J2.6 v2(3414.14,3055)
SWCLK: J4.5 U3.37 | length 570.2
  Top Layer w10: v1(4297.01,3040) 4297.56,3040.55 U3.37
  Top Layer w12: 4585,2675 J4.5@4720,2675
  Bottom Layer w12: 4277,2693 4277,3017.58 4297.01,3037.59 v1(4297.01,3040)
SWDIO: J4.3 U3.34 | length 521.7
  Top Layer w12: v1(4260,3131.1) U3.34
  Bottom Layer w12: 4260,2675 v1(4260,3131.1)
TR: P1.2 R10.2 U3.10 | length 874.9
  Top Layer w10: 4615,3915 4615,3566.3 4631.03,3550.27 4743.2,3550.27 4760,3533.46 4760,3290.35 4738.54,3268.9 U3.10
UART_RX: TP2.1 U3.43 | length 668.3
  Top Layer w12: TP2.1@4130,2705 4208.71,2705 ccw(c4208.71,2732.82) 4228.39,2713.15 ccw(c4212.42,2729.12) 4235,2729.12 4235,2930 cw(c4268.15,2930) 4268.15,2963.15 4478.46,2963.15 ccw(c4478.46,2979.53) 4494.84,2979.53 U3.43
UART_TX: TP1.1 U3.42 | length 535.2
  Top Layer w12: TP1.1@4135,2805 4180.47,2805 ccw(c4180.47,2834.75) 4201.51,2813.71 ccw(c4181.01,2834.21) 4210,2834.21 4210,2935 cw(c4260,2935) 4260,2985 4460.16,2985 ccw(c4460.16,3000) 4475.16,3000 U3.42
VIN: C25.1 C28.1 J6.1 PAD1.1 Q1.3 R6.2 R21.1 TP4.1 U4.6 | length 3423.4
  Top Layer w10: Q1.3 5675,3710 5690,3725 5690,3780 ; 5515,4760 5515,4774.14 5539.53,4798.67 5723.67,4798.67 5774.65,4849.65 C28.1 5779.88,5163.15 5779.88,5170.88 5790,5181 R21.1 5777,5215 U4.6
  Top Layer w50: R6.2 5170,3865 5180,3855 Q1.3
  Bottom Layer w70: Q1.3 5385,3710 5465,3630 5465,3100 ; 5465,2700 5465,3100 ; 6050,3158.07 5523.07,3158.07 5465,3100
pads on no net: U1.7 U2.4 U3.1 U3.3 U3.4 U3.14 U3.15 U3.25 U3.26 U3.27 U3.28 U3.31 U3.33 U3.38 U3.39 U3.40 U3.41
copper on no net: | length 61.5
  Top Layer w15: 5508.15,3116.18 5543.82,3116.18 5555,3105 5555,3095

## Silkscreen, mask and mechanical layers (free items; w line width, h text height)
Top Overlay:
  text "ESD" at 3801,4031 h30
  text "+" at 6210,3580 h30 r90
  text "SW3" at 3270,3440 h30
  text "SW2" at 3270,3340 h30
  text "SW1" at 3270,3240 h30
  text "+" at 6210,3145 h30 r90
  text "E_B" at 3270,3140 h30
  text "E_A" at 3270,3040 h30
Bottom Overlay:
  text "GND" at 3275,3470 h30 r180
  text "SDA" at 3270,3370 h30 r180
  text "SCL" at 3270,3270 h30 r180
  text "3V3" at 3270,3170 h30 r180
  text "SW" at 3270,3070 h30 r180

## Dimensions
6225,5965 to 6225,2575 on Mechanical 1
3075,5965 to 6225,5965 on Mechanical 1

## Text inside footprints (layer, text, board x,y; h text height)
C1: Mechanical 17 "d" at 4334.35,3812 h30 r180; Mechanical 19 "-" at 4334.35,3812 h30 r180
C3: Mechanical 17 "d" at 4276,3728 h30; Mechanical 19 "-" at 4276,3728 h30
C4: Mechanical 17 "d" at 4205,3645 h30; Mechanical 19 "-" at 4205,3645 h30
C5: Mechanical 17 "d" at 4199.39,3693 h30; Mechanical 19 "-" at 4199.39,3693 h30
C6: Mechanical 17 "d" at 4748.86,3825 h30 r90; Mechanical 19 "-" at 4748.86,3825 h30 r90
C7: Mechanical 17 "d" at 4792,3756 h30 r90; Mechanical 19 "-" at 4792,3756 h30 r90
C8: Mechanical 17 "d" at 4702,3816.91 h30 r90; Mechanical 19 "-" at 4702,3816.91 h30 r90
C9: Mechanical 17 "d" at 3451.14,3336.99 h30 r90; Mechanical 19 "-" at 3451.14,3336.99 h30 r90
C10: Mechanical 17 "d" at 3462,3040.65 h30 r90; Mechanical 19 "-" at 3462,3040.65 h30 r90
C11: Mechanical 17 "d" at 3445.53,3269 h30 r270; Mechanical 19 "-" at 3445.53,3269 h30 r270
C12: Mechanical 17 "d" at 3447.14,3469 h30 r270; Mechanical 19 "-" at 3447.14,3469 h30 r270
C13: Mechanical 17 "d" at 4795,3280.35 h30 r270; Mechanical 19 "-" at 4795,3280.35 h30 r270
C14: Mechanical 17 "d" at 4753,3258.53 h30 r270; Mechanical 19 "-" at 4753,3258.53 h30 r270
C15: Mechanical 17 "d" at 4713,3258.53 h30 r270; Mechanical 19 "-" at 4713,3258.53 h30 r270
C16: Mechanical 17 "d" at 5068,3294 h30 r270; Mechanical 19 "-" at 5068,3294 h30 r270
C17: Mechanical 17 "d" at 5072,3066 h30 r90; Mechanical 19 "-" at 5072,3066 h30 r90
C18: Mechanical 17 "d" at 4211.26,3410 h30 r270; Mechanical 19 "-" at 4211.26,3410 h30 r270
C19: Mechanical 17 "d" at 4258,3419 h30 r270; Mechanical 19 "-" at 4258,3419 h30 r270
C20: Mechanical 17 "d" at 4205,3095 h30 r270; Mechanical 19 "-" at 4205,3095 h30 r270
C21: Mechanical 17 "d" at 4253,3104 h30 r270; Mechanical 19 "-" at 4253,3104 h30 r270
C22: Mechanical 17 "d" at 4590,2915 h30; Mechanical 19 "-" at 4590,2915 h30
C23: Mechanical 17 "d" at 4581,2963 h30; Mechanical 19 "-" at 4581,2963 h30
C24: Mechanical 17 "d" at 5204,2956 h30 r180; Mechanical 19 "-" at 5204,2956 h30 r180
C25: Top Overlay "+" at 5807,4617 h30; Top Overlay "+" at 5807,4725 h30; Top Overlay "-" at 5388,4624 h30 r90; Top Overlay "-" at 5388,4728 h30 r90
D1: Mechanical 17 "d" at 4705,2915 h30 r90; Mechanical 19 "-" at 4705,2915 h30 r90
J1: Mechanical 17 "d" at 6023.94,3661.18 h30 r270; Mechanical 19 "-" at 6023.94,3661.18 h30 r270
J4: Top Overlay "DIO" at 4566,2661 h30; Top Overlay "CLK" at 4566,2711 h30; Top Overlay "RST" at 4566,2761 h30; Top Overlay "GND" at 4936,2661 h30; Top Overlay "GND" at 4936,2711 h30; Top Overlay "3V3" at 4936,2761 h30
R1: Mechanical 17 "d" at 4348.87,3667.08 h30; Mechanical 19 "-" at 4349,3667 h30
R2: Mechanical 17 "d" at 4572.16,3566.13 h30 r270; Mechanical 19 "-" at 4572.08,3566 h30 r270
R4: Mechanical 17 "d" at 4447.92,3703.87 h30 r90; Mechanical 19 "-" at 4448,3704 h30 r90
R5: Mechanical 17 "d" at 4402.08,3766.13 h30 r270; Mechanical 19 "-" at 4402,3766 h30 r270
R6: Mechanical 17 "d" at 5020,3840 h30; Mechanical 19 "-" at 5020,3840 h30
R7: Mechanical 17 "d" at 4336.13,3772.92 h30 r180; Mechanical 19 "-" at 4336,3773 h30 r180
R8: Mechanical 17 "d" at 4172.08,3671.13 h30 r270; Mechanical 19 "-" at 4172,3671 h30 r270
R9: Mechanical 17 "d" at 4128.87,3692.08 h30; Mechanical 19 "-" at 4129,3692 h30
R10: Mechanical 17 "d" at 4661.13,3832.92 h30 r180; Mechanical 19 "-" at 4661,3833 h30 r180
R11: Mechanical 17 "d" at 4836.13,3622.92 h30 r180; Mechanical 19 "-" at 4836,3623 h30 r180
R12: Mechanical 17 "d" at 4787.08,3716.13 h30 r270; Mechanical 19 "-" at 4787,3716 h30 r270
R13: Mechanical 17 "d" at 4128.87,3407.08 h30; Mechanical 19 "-" at 4129,3407 h30
R14: Mechanical 17 "d" at 5650,3190 h30 r270; Mechanical 19 "-" at 5650,3190 h30 r270
R15: Mechanical 17 "d" at 4393.87,2842.08 h30; Mechanical 19 "-" at 4394,2842 h30
R16: Mechanical 17 "d" at 4525.97,2847.92 h30 r180; Mechanical 19 "-" at 4525.84,2848 h30 r180
R17: Mechanical 17 "d" at 4302.92,2878.87 h30 r90; Mechanical 19 "-" at 4303,2879 h30 r90
R18: Mechanical 17 "d" at 4533.87,3470.84 h30; Mechanical 19 "-" at 4534,3470.76 h30
R19: Mechanical 17 "d" at 5293.87,2951.08 h30; Mechanical 19 "-" at 5294,2951 h30
R20: Mechanical 17 "d" at 4702.92,3009.42 h30 r90; Mechanical 19 "-" at 4703,3009.55 h30 r90
S1: Mechanical 17 "d" at 5140,3310 h30 r270; Mechanical 19 "-" at 5140,3310 h30 r270
U3: Mechanical 17 "d" at 4585,3210 h30 r180; Mechanical 19 "-" at 4585,3210 h30 r180